# Altium PCB PCB.PcbDoc
Units mm, origin at the board's own origin, x right, y up, seen from the top; angles counter-clockwise.
Board outline 55 x 58 mm, 2 copper layers (Top Layer, Bottom Layer), stack 1.671 mm thick; 38 components, 32 nets, 140 pads, 9 vias.
Unrouted connection lines stored in the file: 2.
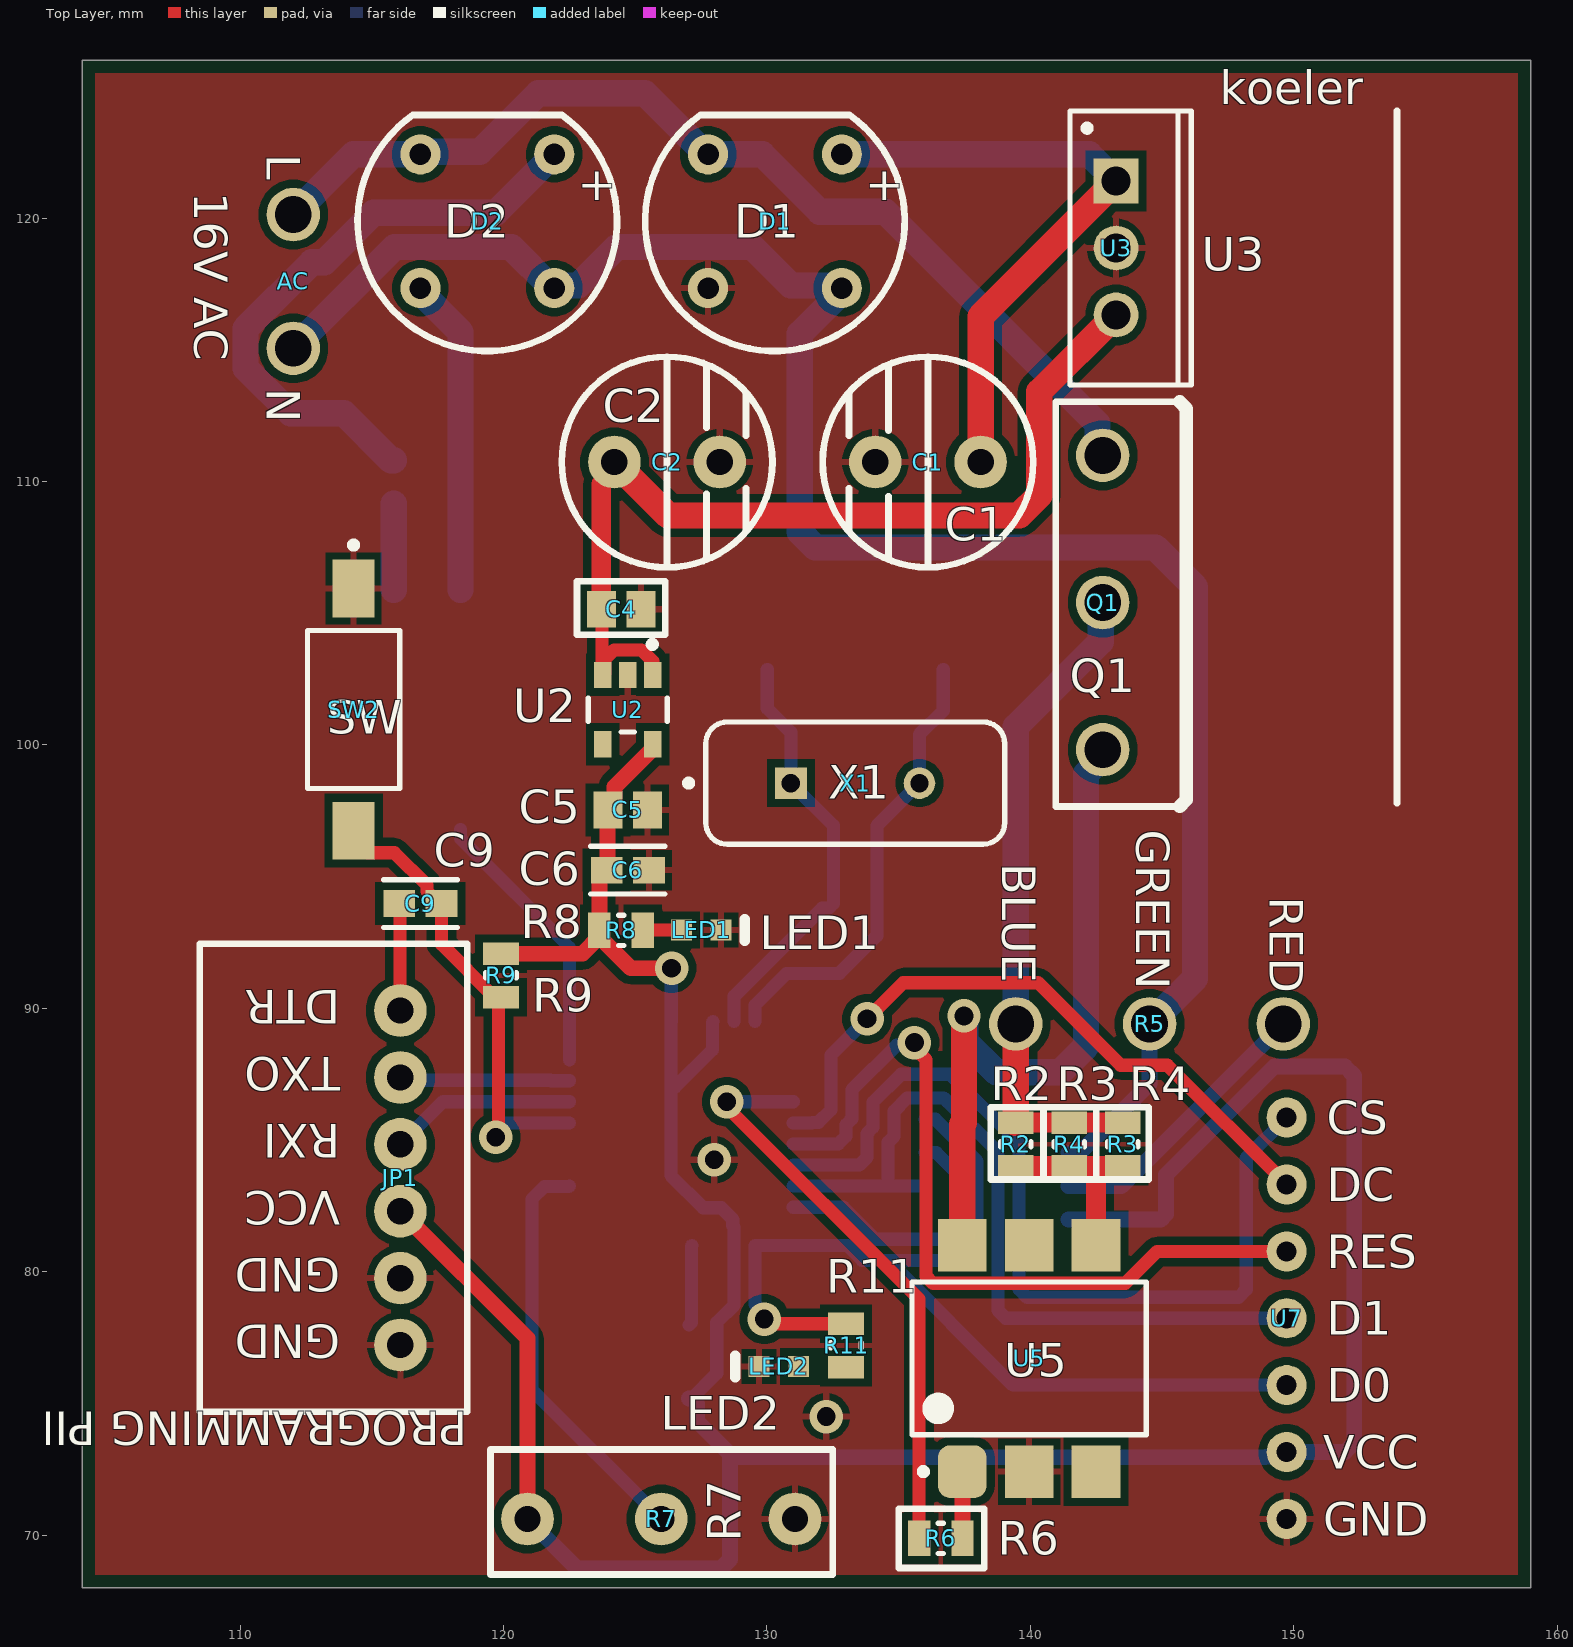
[diagram p0: Top Layer view]
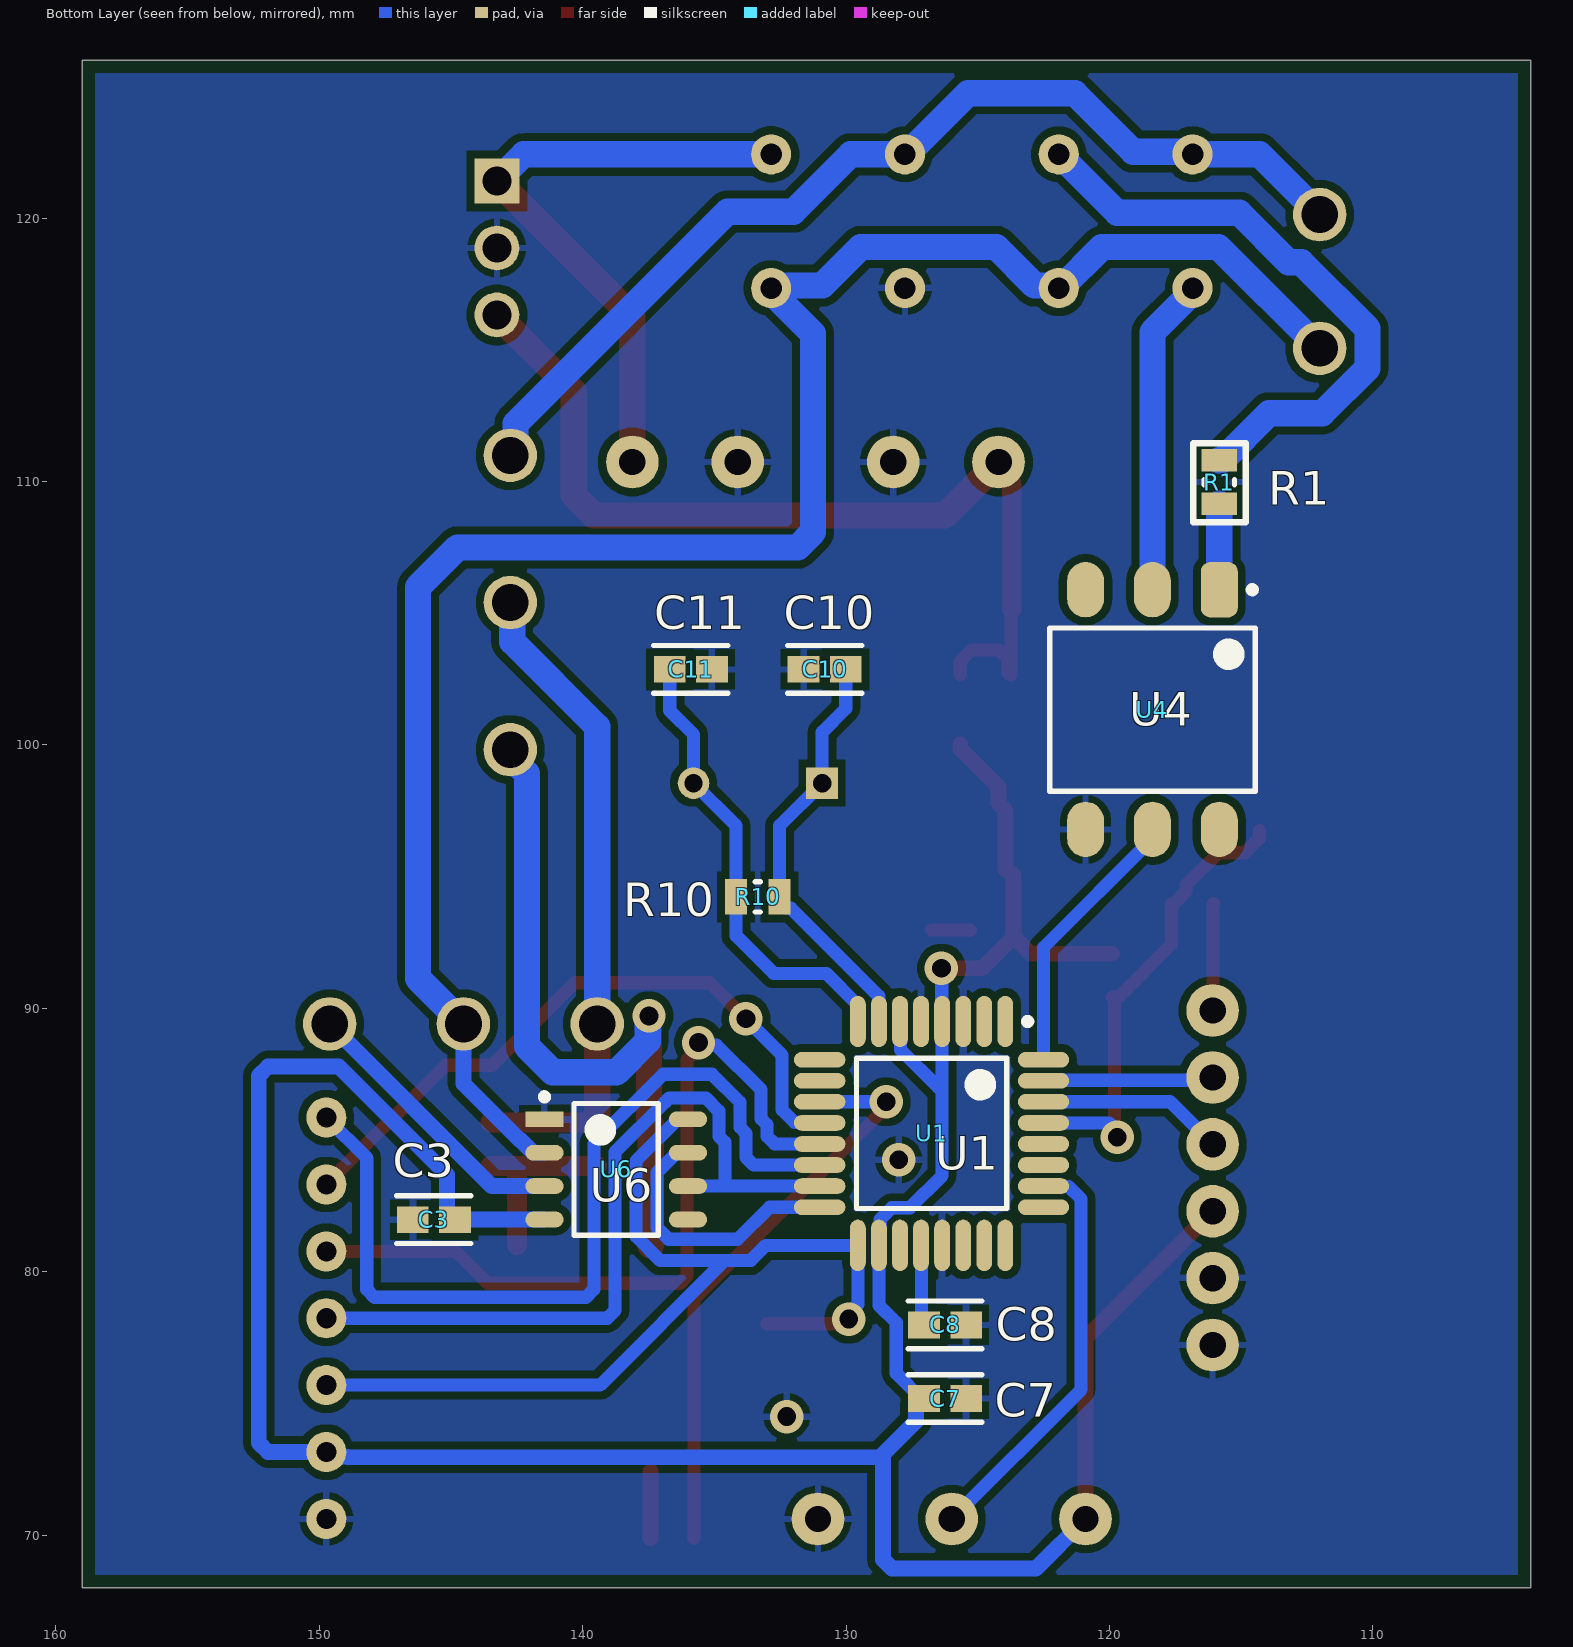
[diagram p1: Bottom Layer view, seen from below]
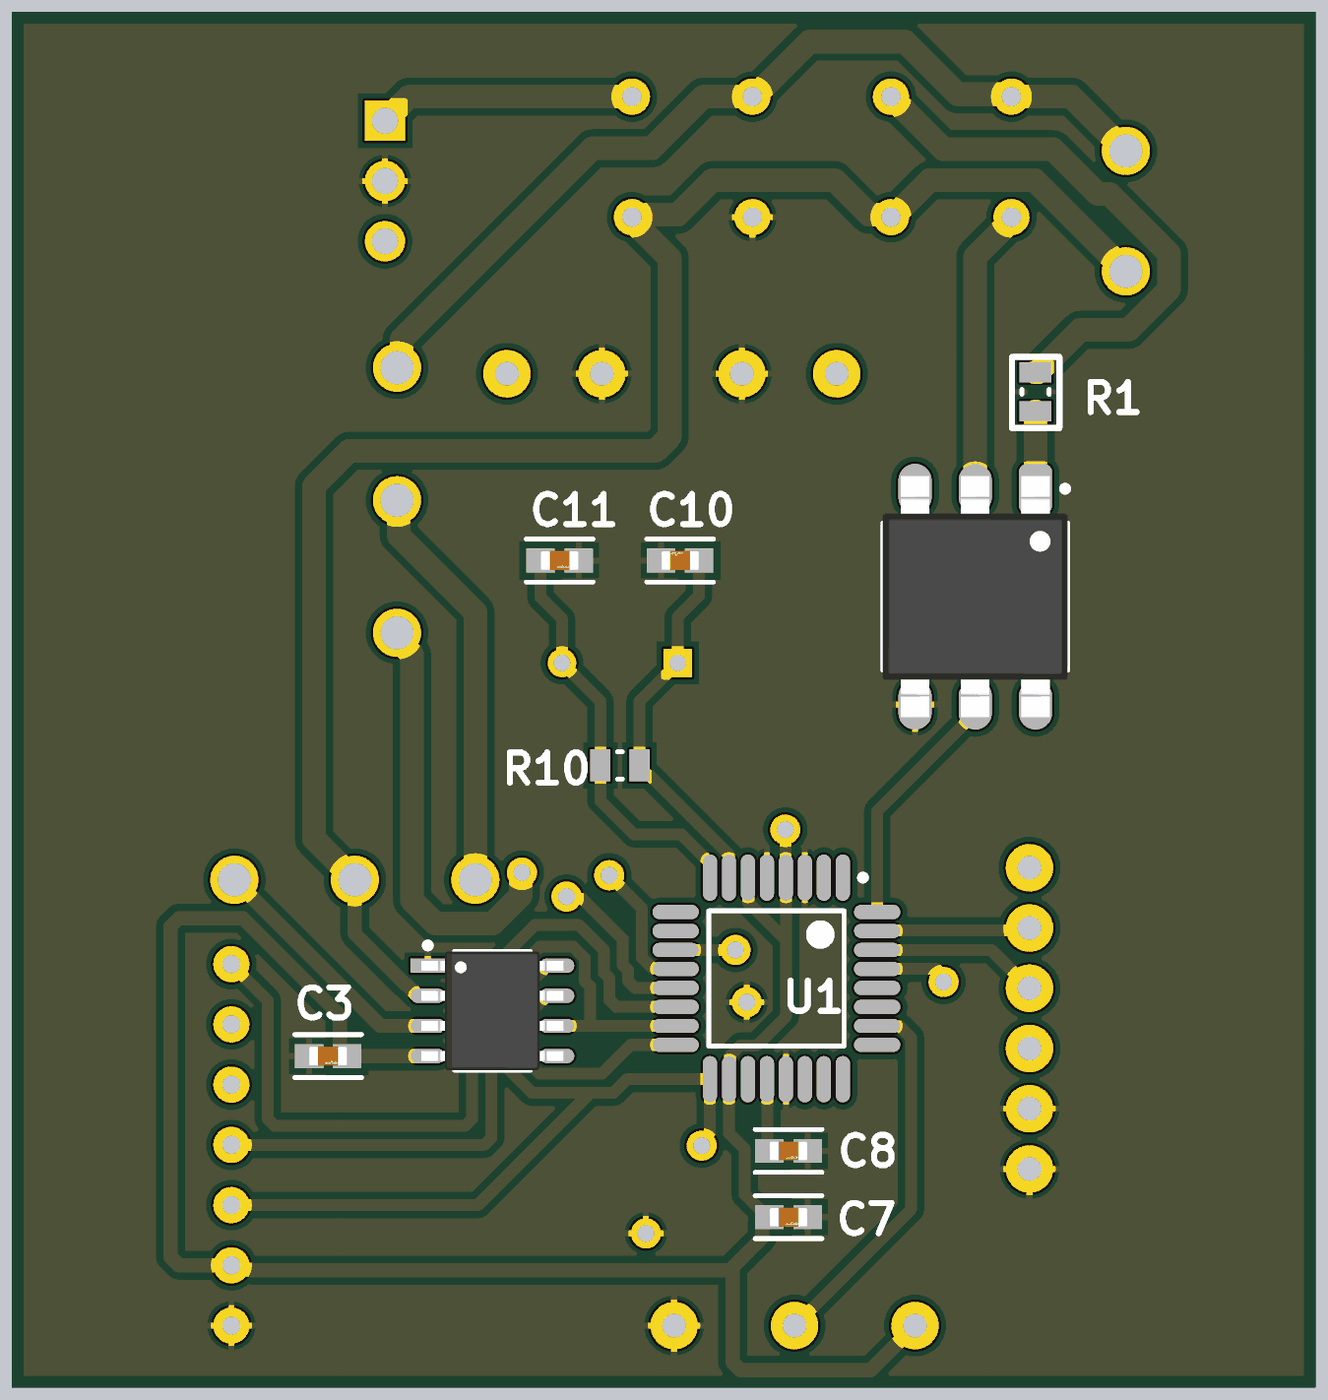
[diagram p2: 3D render of the assembled board from below, using the file's embedded part models]

## Layer stack, top to bottom
Top Solder: solder mask 0.0102, Solder Resist, Dk 3.5
Top Layer: signal copper 0.0356
Dielectric 1: dielectric 1.6, FR-4, Dk 4.8
Bottom Layer: signal copper 0.0356
Bottom Solder: solder mask 0.0102, Solder Resist, Dk 3.5

## Board outline
159,126 104,126 104,68 159,68

## Design rules (kind name [scope] priority, off if disabled: settings)
Clearance [All] p1: gap=0.3 ignorepadtopadclearanceinfootprint=TRUE except(0.2: Arc-SMDPad Track-SMDPad SMDPad-SMDPad)
ComponentClearance [All] p1: gap=0.003 collisioncheckmode=3 verticalgap=0.003 showdistances=FALSE
PolygonConnect [All] p1: connectstyle=Relief reliefconductorwidth=0.254 reliefentries=4 polygonreliefangle="90 Angle" airgapwidth=0.254
RoutingVias [All] p1: holewidth=0.3 width=0.6 viastyle="Through Hole" minholewidth=0.3 minwidth=0.6 maxholewidth=0.3 maxwidth=0.6
SolderMaskExpansion [All] p1: expansion=0.102 istentingtop=FALSE
Width [All] p1: maxlimit=1 minlimit=0.3 preferedwidth=0.5
29 further rules are at their usual default settings.

## Classes and differential pairs
component class Soldeerbord: AC C1 C2 C3 D1 D2 Q1 R1 R2 R3 R4 R5 R6 R7 U3 U4 U5 U6 U7
component class Ardruino_Pro_mini: C4 C5 C6 C7 C8 C9 C10 C11 JP1 LED1 LED2 R8 R9 R10 R11 SW2 U1 U2 X1

## Components (designator, comment, footprint, x,y, rotation, side; value= is the part's Value field where it differs from the comment)
AC "16V" PCB_Voeding_16V_AC 112.014,120.142 r270 top
C1 "1000µF" PCB-Capasitor 138.112,110.744 r180 top
C2 "220µF" PCB-Capasitor 124.206,110.744 r0 top
C3 "0.1uF" FP-GRM188-0_1-e0_2_0_55-IPC_A 145.652,81.975 r180 bottom
C4 "" C0805 124.46,105.156 r0 top value=10uF
C5 "" C0805 124.714,97.536 r0 top value=10uF
C6 "0.1uF" FP-GRM188-0_1-e0_2_0_55-IPC_A 124.714,95.25 r0 top
C7 "0.1uF" FP-GRM188-0_1-e0_2_0_55-IPC_A 126.238,75.184 r180 bottom
C8 "0.1uF" FP-GRM188-0_1-e0_2_0_55-IPC_A 126.238,77.978 r180 bottom
C9 "0.1uF" FP-GRM188-0_1-e0_2_0_55-IPC_A 116.84,93.98 r180 top
C10 "20pF" FP-GRM188-0_1-e0_2_0_55-IPC_A 130.81,102.87 r0 bottom
C11 "20pF" FP-GRM188-0_1-e0_2_0_55-IPC_A 135.89,102.87 r180 bottom
D1 "2W40" PCB_2W40 127.762,117.348 r0 top
D2 "2W40" PCB_2W40 116.84,117.348 r0 top
JP1 "FTDI Basic" PCB_ProgrammingPor 116.078,89.916 r180 top
LED1 "HSMH-C190 RED" AVAG-HSMX-C190_V 127.5,92.975 r0 top
LED2 "HSMG-C190 GREEN" AVAG-HSMX-C190_V 130.45,76.4 r180 top
Q1 "BTB26-600" BTB26-600B 142.748,110.998 r270 top
R1 "2k" RESC2013X50X30LL20T20 115.824,109.982 r270 bottom
R2 "100" RESC2013X50X30LL20T20 139.446,84.836 r270 top
R3 "100" RESC2013X50X30LL20T20 143.51,84.836 r270 top
R4 "100" RESC2013X50X30LL20T20 141.478,84.836 r270 top
R5 "SOLDERING IRON" PCB_Soldering_Iron 139.446,89.408 r0 top
R6 "330" RESC2013X50X30LL20T20 136.6,69.875 r0 top
R7 "WH148_B50K" PCBC_WH148_B50K 120.904,70.612 r0 top
R8 "10k" RESC2013X50X30LL20T20 124.46,92.964 r180 top
R9 "10k" RESC2013X50X30LL20T20 119.9,91.25 r90 top
R10 "1M" RESC2013X50X30LL20T20 133.35,94.234 r180 bottom
R11 "330" RESC2013X50X30LL20T20 133,77.2 r90 top
SW2 "FSMSMTR" TECO-FSMSMTR_V 114.3,101.346 r270 top
U1 "ATmega328P-AU" 32A_M 126.75,85.25 r270 bottom
U2 "MIC5205-3.3YM5-TR" FP-M5-MFG 124.714,101.346 r270 top
U3 "L7809CV" TO220 143.256,118.872 r270 top
U4 "4N25" 4N25-300E 118.364,101.346 r270 bottom
U5 "MOC3020SM" SOP254P920X508-6N 139.954,76.708 r90 top
U6 "MAX6675ISA+" SOP127P600X175-8N 138.725,83.885 r180 bottom
U7 "DISPLAY-OLED-128x64" PCB_SPI_OLED_7pin 149.733,70.612 r90 top
X1 "FOXSLF/160-20" FOX-FOXSLF160-20 133.35,98.552 r0 top

## Footprints (in the part's own frame and the unit in brackets; to place one, negate y for a bottom-side part, rotate by r counter-clockwise, add the part's x,y. Pads: shape width x height; smd on the part's side, far side on the other; paste and mask are expansions set on the pad)
4N25-300E [mm] "SOP, 6-Leads, Body 7,30x6,50mm, Pitch 2,54mm, IPC Medium Density"
  rrect50% 2.1x1.4 smd: 1(-4.55,2.54)
  oval 2.1x1.4 smd: 2(-4.55,0) 3(-4.55,-2.54) 4(4.55,-2.54) 5(4.55,0) 6(4.55,2.54)
  silkscreen extent -4.67,-3.9 3.1,3.91, body extent -5.08,-3.9 5.08,3.9, height 4.6
32A_M [mm] "Thin QFP, 32-Leads, Body 7x7mm, Pitch 0.8mm, IPC Low Density"
  oval 1.95x0.6 smd: 1(-4.25,2.8) 2(-4.25,2) 3(-4.25,1.2) 4(-4.25,0.4) 5(-4.25,-0.4) 6(-4.25,-1.2) 7(-4.25,-2) 8(-4.25,-2.8) 17(4.25,-2.8) 18(4.25,-2) 19(4.25,-1.2) 20(4.25,-0.4) 21(4.25,0.4) 22(4.25,1.2) 23(4.25,2) 24(4.25,2.8)
  oval 0.6x1.95 smd: 9(-2.8,-4.25) 10(-2,-4.25) 11(-1.2,-4.25) 12(-0.4,-4.25) 13(0.4,-4.25) 14(1.2,-4.25) 15(2,-4.25) 16(2.8,-4.25) 25(2.8,4.25) 26(2,4.25) 27(1.2,4.25) 28(0.4,4.25) 29(-0.4,4.25) 30(-1.2,4.25) 31(-2,4.25) 32(-2.8,4.25)
  silkscreen extent -4.37,-2.85 2.85,3.77, body extent -3.5,-3.5 3.5,3.5, height 1.2
AVAG-HSMX-C190_V [mm] "SMD, 2-Leads, Body 1.6x0.8mm, Height 0.9mm"
  rect 0.8x0.8 smd: 1(-0.75,0) 2(0.75,0)
  silkscreen extent 1.65,-0.4 1.65,0.4, body extent -0.8,-0.4 0.8,0.4, height 0.9
BTB26-600B [mil]
  round 80 hole 55: 1(0,0) 2(220,0) 3(440,0)
  silkscreen extent -80,-70 525,125, body extent -80,-55 525,125, height 820
C0805 [mm] "Chip Capacitor, Body 2.0x1.3mm, IPC High Density"
  rect 1.1x1.4 smd: 1(-0.75,0) 2(0.75,0)
  body extent -1.1,-0.72 1.1,0.72, height 1.4
FOX-FOXSLF160-20 [mm] "THD, 2-Leads, Body 11.35x4.65mm"
  rect 1.2x1.2 hole 0.7: 1(-2.44,0)
  round 1.2 hole 0.7: 2(2.44,0)
  silkscreen extent -6.45,-2.32 5.68,2.32, body extent -5.67,-2.32 5.68,2.33, height 3.6
FP-GRM188-0_1-e0_2_0_55-IPC_A [mm]
  rect 1.208x1.012 smd paste+0 mask+0: 1(-0.802,0) 2(0.802,0)
  silkscreen extent -1.41,-0.91 1.41,0.91, body extent -0.8,-0.4 0.8,0.4, height 0.9
FP-M5-MFG [mm]
  rect 1x0.66 smd paste+0 mask+0: 1(-1.315,0.95) 2(-1.315,0) 3(-1.315,-0.95) 4(1.315,-0.95) 5(1.315,0.95)
  silkscreen extent -2.6,-1.5 0.85,1.5, body extent -1.4,-1.46 1.4,1.46, height 1.3
PCB-Capasitor [mm]
  round 2 hole 1: 1(0,0) 2(4,0)
  silkscreen extent -2,-4 6,4, body extent -2,-4 6,4, height 16
PCB_2W40 [mil]
  round 60 hole 32: 1(0,200) 2(0,0) 3(200,200) 4(200,0)
  silkscreen extent -94,-94 294,259, body extent -95,-95 295,260, height 180
PCB_ProgrammingPor [mm]
  round 2 hole 1: DTR(0,0) GND(0,12.7) GND(0,10.16) RXI(0,5.08) TXO(0,2.54) VCC(0,7.62)
  silkscreen extent -2.54,-2.54 7.62,15.24, body extent -1.27,-1.27 1.27,13.97, height 20
PCB_Soldering_Iron [mil]
  round 80 hole 55: B(0,0) G(200,0) R(400,0)
  body extent -30,-30 430,30, height 300
PCB_SPI_OLED_7pin [mil]
  round 60 hole 30: 1(0,0) 2(100,0) 3(200,0) 4(300,0) 5(400,0) 6(500,0) 7(600,0)
  body extent -25,-25 625,25, height 300
PCB_Voeding_16V_AC [mil]
  round 80 hole 55: L(0,0) N(200,0)
  body extent -30,-30 230,30, height 300
PCBC_WH148_B50K [mm]
  round 2 hole 1: 1(0,0) 2(5.08,0) 3(10.16,0)
  body extent -1.25,-2 11.5,3.75, height 20
RESC2013X50X30LL20T20 [mm] "Chip Resistor, 2-Leads, Body 2.00x1.25mm, IPC High Density"
  rect 0.85x1.35 smd: 1(-0.825,0) 2(0.825,0)
  silkscreen extent -0.1,-0.58 0.1,0.58, body extent -1.1,-0.72 1.1,0.72, height 0.5
SOP127P600X175-8N [mm] "SOP, 8-Leads, Body 4,90x3,90mm, Pitch 1,27mm, IPC Medium Density"
  rect 1.45x0.6 smd: 1(-2.725,1.905)
  oval 1.45x0.6 smd: 2(-2.725,0.635) 3(-2.725,-0.635) 4(-2.725,-1.905) 5(2.725,-1.905) 6(2.725,-0.635) 7(2.725,0.635) 8(2.725,1.905)
  silkscreen extent -2.85,-2.5 1.6,2.88, body extent -3,-2.5 3,2.5, height 1.75
SOP254P920X508-6N [mm] "SOP, 6-Leads, Body 8,51x6,35mm, Pitch 2,54mm, IPC Medium Density"
  rrect50% 2x1.85 smd: 1(-4.3,2.54)
  rect 2x1.85 smd: 2(-4.3,0) 3(-4.3,-2.54) 4(4.3,-2.54) 5(4.3,0) 6(4.3,2.54)
  silkscreen extent -4.42,-4.45 2.9,4.45, body extent -4.58,-4.45 4.58,4.45, height 5.08
TECO-FSMSMTR_V [mm] "SMD, 2-Leads, Body 6x3.5mm, Pitch 9.19mm"
  rect 2.2x1.6 smd: 1(-4.595,0)
  rect 2.18x1.6 smd: 2(4.595,0)
  silkscreen extent -6.37,-1.75 3,1.75, body extent -4.98,-1.75 4.98,1.75, height 4.4
TO220 [mm] "TO, Thru-Hole, Vertical, Heatsink Mounted; 3 In-Line Leads; Pitch 2.54 mm"
  rect 1.7x1.7 hole 1.1: 1(-2.54,0)
  round 1.7 hole 1.1: 2(0,0) 3(2.54,0)
  silkscreen extent -5.2,-1.75 5.2,2.85, body extent -5.25,-1.8 5.25,2.9, height 19.7

## Part data
AC: library part Voeding_16V_AC
C1 C2: library part Capasitor
C3 C7 C8 C9 C10 C11: library part CMP-2006-02792-2, "Chip Multilayer Ceramic Capacitors for General Purpose, 0603, 10uF, X5R, 15%, 20%, 6.3V", Capacitance=10uF, Case Code (Imperial)=0603, Case Code (Metric)=1608, Dielectric=X5R, Max Operating Temperature=85°C, Min Operating Temperature=-55°C, Package Quantity=4000, Tolerance=20%, Voltage=6.3V, Case/Package=0603, Depth=0.8mm, Height=0.8mm, Lead Free="Lead Free", Length=1.6mm, Material=Ceramic, Mount="Surface Mount", Packaging="Tape and Reel", Radiation Hardening=No, REACH SVHC="No SVHC", Termination=SMD/SMT, Thickness=0.035inch, Voltage Rating=6.3V, Voltage Rating (DC)=6.3V, Width=0.031inch
C4 C5: library part "Cap Pol3", "Polarized Capacitor (Surface Mount)", LatestRevisionDate=29-May-2009, LatestRevisionNote="IPC-7351 Footprint Added.", PackageDescription="Chip Capacitor", PackageReference=C0805, Published=8-Jun-2000, Publisher="Altium Limited"
C6: library part CMP-2006-02792-2, "Chip Multilayer Ceramic Capacitors for General Purpose, 0603, 10uF, X5R, 15%, 20%, 6.3V", Case Code (Imperial)=0603, Case Code (Metric)=1608, Dielectric=X5R, Max Operating Temperature=85°C, Min Operating Temperature=-55°C, Package Quantity=4000, Tolerance=20%, Voltage=6.3V, Capacitance=0.1uF, Case/Package=0603, Depth=0.8mm, Height=0.8mm, Lead Free="Lead Free", Length=1.6mm, Material=Ceramic, Mount="Surface Mount", Packaging="Tape and Reel", Radiation Hardening=No, REACH SVHC="No SVHC", Termination=SMD/SMT, Thickness=0.035inch, Voltage Rating=6.3V, Voltage Rating (DC)=6.3V, Width=0.031inch
JP1: library part ProgrammingPort
LED1: library part CMP-1744-00004-1, "LED Uni-Color Red, 65 mW, 20 mA, -40 to 85 degC, 2-Pin SMD, RoHS, Tape and Reel", Current Rating="1 A", Max Operating Temperature="85 degC", Min Operating Temperature="-30 degC", Package Quantity=2000, ComponentLink1Description="Manufacturer URL", ComponentLink1URL=http://www.avagotech.com/, ComponentLink2Description=Datasheet, ComponentLink2URL=http://docs.avagotech.com/docs/AV02-0551EN, ComponentLink3Description="Package Specification", ComponentLink3URL=http://www.fairchildsemi.com/dwg/MA/MA03D.pdf, Connector Type=USB, Contact Material=Copper, Contact Plating=Gold, DatasheetVersion=Mar-12, Gender=Male, Height="2.8 mm", Lead Pitch="0.65 mm", Length="7.5 mm", Mount="Surface Mount", PackageDescription="2-Pin Surface Mount Device, Body 1.6 x 0.8 mm, Height 0.9 mm", PackageReference=HSMX-C190, Packaging="Tape and Reel", Pins=5, REACH SVHC="No SVHC", RoHSCompliant=true, Width="5.6 mm"
LED2: library part CMP-1744-00002-1, "Chip LED, Green, 2.2 V, -40 to 85 degC, 2-Pin SMD, RoHS, Tape and Reel", Case\Package=SOIC, Clock Frequency="100 KHz", Frequency="400 KHz", Max Operating Temperature="85 degC", Max Supply Voltage="5.5 V", Min Operating Temperature="-40 degC", Min Supply Voltage="1.7 V", Nominal Supply Current="2 mA", Package Quantity=3000, Access Time="3500 ns", ComponentLink1Description="Manufacturer URL", ComponentLink1URL=http://www.avagotech.com/, ComponentLink2Description=Datasheet, ComponentLink2URL=http://docs.avagotech.com/docs/AV02-0551EN, ComponentLink3Description="Package Specification", ComponentLink3URL=http://www.fairchildsemi.com/dwg/MA/MA03D.pdf, DatasheetVersion=Mar-12, Density="32 kb", Height="1.5 mm", Interface=Serial, Length="5 mm", Max Clock Frequency="100 KHz", Mount="Surface Mount", PackageDescription="2-Pin Surface Mount Device, Body 1.6 x 0.8 mm, Height 0.9 mm", PackageReference=HSMX-C190, Packaging="Tape and Reel", Pins=8, Radiation Hardening=No, REACH SVHC="No SVHC", RoHSCompliant=true, Width="4 mm"
Q1: library part BTB26-600B
R1 R2 R3 R4 R6 R8 R9 R10 R11: library part CMP-2001-04896-1, Manufacturer="Vishay Dale", Part Number=CRCW08050000Z0EA
R5: library part Soldering_Iron
SW2: library part CMP-2000-07501-1, "FSMSM Push Button Switch, 50 mA, -35 to 85 degC, 2-Pin SMD, RoHS, Tape and Reel", Case\/Package=SMD/SMT, Contact Current Rating=50mA, Contact Resistance=100mOhm, Manufacturer="TE Connectivity", Max Operating Temperature=85degC, Max Voltage Rating (DC)=12V, Min Operating Temperature=-35degC, Operating Force=180gf, Package Description="2-Pin Surface Mount Device, Body 6 x 3.5 mm, Pitch 9.19 mm", Package Quantity=1800, Voltage Rating (DC)=24V, Actuator Length=1.07mm, Actuator Material=Polyamide, Contact Material=Brass, Contact Plating=Silver, Current Rating=50mA, Datasheet URL=http://www.te.com/commerce/DocumentDelivery/DDEController?Action=showdoc&DocId=Customer+Drawing%7F1437566-3%7FC2%7Fpdf%7FEnglish%7FENG_CD_1437566-3_C2_1437566_3_1_c.dwg.pdf%7F1437566-4, Datasheet Version="Rev. C2, 08/2014", Electrical Life=20000Cycles, ELV=Compliant, Illumination Type=Illuminated, Lead Free=LeadFree, Manufacturer URL=http://www.te.com/, Mechanical Life=20000Cycles, Mount=SurfaceMount, Mounting Technology=SurfaceMount, Orientation=Straight, Package Reference=FSMSMTR, Packaging=TapeandReel, REACH SVHC=Unknown, RoHSCompliant=true, Switch Travel=0.25mm, Termination=GullWing, Throw Configuration=SPST
U1: library part CMP-0095-00269-2, "8-bit AVR Microcontroller, 32KB Flash, 1KB EEPROM, 2KB SRAM, 32-pin TQFP, Industrial Grade (-40°C to 85°C)", Code_JEDEC=MS-026-ABA, ComponentLink1Description="Manufacturer URL", ComponentLink1URL=http://www.atmel.com/, ComponentLink2Description="ATmega48A/48PA/88A/88PA/168A/168PA/328/328P Datasheet", ComponentLink2URL=http://www.atmel.com/dyn/resources/prod_documents/doc8271.pdf, ComponentLink3Description="ATmega48A/48PA/88A/88PA/168A/168PA/328/328P Summary", ComponentLink3URL=http://www.atmel.com/dyn/resources/prod_documents/8271S.pdf, DatasheetVersion="revD, May-2011", PackageDescription="32-Lead, 7x7x1.0 mm Body, 0.8mm Lead Pitch, Thin Profile Plastic Quad Flat Package (TQFP)", PackageReference=32A, PackageVersion="revC, Oct-2010", RevisionNote="DatasheetVersion & PackageVersion updated. URLs added."
U2: library part CMP-06324-000014-1, "IC REG LINEAR 3.3V 150MA SOT23-5", Dropout Voltage=165mV, Manufacturer=Microchip, Max Junction Temp=+125°C, Max Supply Voltage=16V, Min Supply Voltage=2.5V, Output Current=150mA, Package=M5, Temperature="-40°C to +125°C", Temperature Range Low=-40°C, Accuracy Percentage=2%, Automotive=No, ComponentLink2Description=Datasheet, ComponentLink2URL=http://ww1.microchip.com/downloads/en/DeviceDoc/20005785A.pdf, Device Class L1="Integrated Circuits (ICs)", Device Class L2="Power Management ICs", Device Class L3="Voltage Regulators - Linear", Digikey Description="IC REG LINEAR 3.3V 150MA SOT23-5", Height=1.45mm, Ipc Land Pattern Name=SOT95P280X118-5, Lead Free=Yes, Manufacturer Part Number=MIC5205-3.3YM5-TR, Mouser Description="LDO Voltage Regulators", Number Of Outputs=1, Octopart=https://octopart.com/mic5205-3.3ym5-tr-microchip-66802130, Output Type=Fixed, RoHS=TRUE, Standoff Height=0mm, Temperature Range High=+125°C
U3: library part CMP-0244-00424-1, "Positive Voltage Regulator, 24V, 3-Pin TO-220", ComponentLink1Description="Manufacturer URL", ComponentLink1URL=http://www.st.com, ComponentLink2Description=Datasheet, ComponentLink2URL=http://www.st.com/internet/com/TECHNICAL_RESOURCES/TECHNICAL_LITERATURE/DATASHEET/CD00000444.pdf, ComponentLink3Description="Package Specification", ComponentLink3URL=http://www.st.com/internet/com/TECHNICAL_RESOURCES/TECHNICAL_LITERATURE/PACKAGE_INFORMATION/CD00004649.pdf, DatasheetVersion=16/11/2011, PackageDescription="TO, Thru-Hole, Vertical, Heatsink Mounted; 3 In-Line Leads; Pitch 2.54 mm", PackageReference=TO220, PackageVersion=ver3.0
U4: library part 4N25-300E
U7: library part SPI_OLED_7Pin
X1: library part CMP-1749-00003-1, "Resistance Weld Thru-Hole Crystal, 16 MHz, -20 to 70 degC, 2-Pin THD, RoHS, Bulk", Case\Package=Axial, Max Operating Temperature="155 degC", Min Operating Temperature="-55 degC", Package Quantity=200, Power Rating="250 mW", Resistance="221 kohm", Tolerance=1%, Voltage Rating="250 V", ComponentLink1Description="Manufacturer URL", ComponentLink1URL=http://www.foxonline.com/, ComponentLink2Description=Datasheet, ComponentLink2URL=http://www.foxonline.com/pdfs/hc49slf.pdf, DatasheetVersion=Mar-15, Length="0.248 inch", Mount="Through Hole", PackageDescription="2-Pin Through Hole Device, Body 11.35 x 4.65 mm", PackageReference=FOXSLF160-20, Packaging=Bulk, RoHSCompliant=true

## Via types
v1: diameter 1.27, hole 0.711, Top Layer to Bottom Layer, 9 vias

## Nets (pads, with @x,y where several pads share a name; then routed paths per layer and width w, separated by ;. In a path a pad name is that pad's centre, name@x,y a point inside that pad or via, vN(x,y) a via of type N, cw(c..) or ccw(c..) an arc to the next point about the centre after c; other vN are vias at no path point)
9V_DC: C2.1 C4.1 U2.1 U2.3 U3.3 | length 37
  Top Layer w0.5: C4.1 123.737,105.129 123.737,102.688 U2.3 123.844,102.741 123.844,103.257 124.198,103.611 125.23,103.611 125.664,103.177 U2.1
  Top Layer w0.75: C4.1 123.71,109.91 124.206,110.406 C2.1
  Top Layer w1: C2.1 126.238,108.712 139.573,108.712 140.335,109.474 140.335,113.411 U3.3
16V_AC_L: AC.L D1.1 D2.1 Q1.1 | length 38.9
  Bottom Layer w1: AC.L 114.3,122.428 D2.1 116.94,122.528 119.094,122.528 121.315,124.75 125.365,124.75 127.687,122.428 129.822,122.428 132,120.25 134.5,120.25 142.551,112.199 142.551,111.195 Q1.1
16V_AC_N: AC.N D1.4 D2.4 R5.G U6.2 | length 73.7
  Bottom Layer w0.6: U6.2 141.875,84.52 142.345,84.99 142.382,84.99 144.526,87.134 R5.G
  Bottom Layer w1: AC.N 115.862,118.91 120.283,118.91 121.845,117.348 121.945,117.448 122.837,117.448 124.299,118.91 129.442,118.91 130.903,117.448 D1.4@132.742,117.448 ; D1.4 132.842,117.206 131.25,115.614 131.25,108.086 131.836,107.5 144.75,107.5 146.25,106 146.25,91.132 R5.G
GND: C1.2 C2.2 C3.1 C4.2 C5.2 C6.2 C7.2 C8.2 C10.2 C11.2 D1.2 JP1.GND LED1.2 LED2.2 R7.3 SW2.1 U1.3 U1.5 U1.21 U2.2 U3.2 U4.4 U5.2 U6.1 U7.1
  other v1: 132.25,74.5 128,84.25
NetC1_1: C1.1 D1.3 U3.1 | length 23.6
  Top Layer w1: C1.1 138.112,116.268 U3.1
  Bottom Layer w1: D1.3 142.24,122.428 U3.1
NetC8_1: C8.1 U1.20 | length 3.1
  Bottom Layer w0.5: C8.1 127.131,78.069 127.131,80.981 U1.20
NetC9_1: C9.1 R9.1 SW2.2 U1.29 | length 17.8
  Top Layer w0.5: SW2.2 114.3,96.461 114.85,95.911 115.854,95.911 117.092,94.672 117.092,94.431 117.544,93.98 C9.1 117.642,92.433 119.65,90.425 R9.1 119.8,90.325 119.8,85.2 v1(119.7,85.1)
  Bottom Layer w0.5: v1@119.7,85.325 120.025,85.65 U1.29
NetC9_2: C9.2 JP1.DTR | length 4.1
  Top Layer w0.5: C9.2 116.058,93.96 116.058,89.936 JP1.DTR
NetC10_1: C10.1 R10.2 U1.7 X1.1 | length 16.1
  Bottom Layer w0.5: U1.7 128.75,90.459 132.1,93.809 132.35,93.809 132.525,93.984 R10.2 132.525,96.937 X1.1 130.91,100.484 130.008,101.386 C10.1
NetC11_1: C11.1 R10.1 U1.8 X1.2 | length 17.5
  Bottom Layer w0.5: U1.8 129.55,90.128 130.747,91.325 132.75,91.325 134.175,92.75 R10.1 134.175,96.937 X1.2 135.79,100.404 136.692,101.306 C11.1
NetD2_2: D2.2 U4.2 | length 12.1
  Bottom Layer w1: D2.2 116.84,117.206 118.364,115.682 U4.2
NetD2_3: D2.3 R1.1 | length 23
  Bottom Layer w1: R1.1 115.724,110.807 113.935,112.596 111.912,112.596 110.198,114.31 110.198,115.814 112.71,118.326 113.188,118.326 115.072,120.21 119.702,120.21 D2.3
NetJP1_RXI: JP1.RXI U1.30 | length 7.1
  Bottom Layer w0.5: JP1.RXI 117.692,86.45 U1.30
NetJP1_TXO: JP1.TXO U1.31 | length 6.5
  Bottom Layer w0.5: JP1.TXO 116.185,87.269 121.779,87.269 121.798,87.25 U1.31
NetLED1_1: LED1.1 R8.1 | length 1.5
  Top Layer w0.5: R8.1 125.291,92.97 126.745,92.97 LED1.1
NetLED2_1: LED2.1 R11.1
NetQ1_2: Q1.2 R2.1 R3.1 R4.1 R5.B | length 25.2
  Top Layer w0.75: R2.1 R4.1 R3.1
  Top Layer w1: R2.1 R5.B
  Bottom Layer w1: R5.B 139.446,100.696 142.675,103.925 142.675,105.337 Q1.2
NetQ1_3: Q1.3 U5.6 | length 26.7
  Top Layer w1: U5.6 137.414,85.592 137.481,85.659 v1(137.481,89.712)
  Bottom Layer w1: v1(137.481,89.712) 137.532,89.66 137.532,88.753 138.718,87.568 141.13,87.568 142.113,88.551 142.113,98.908 142.748,99.543 Q1.3
NetR1_2: R1.2 U4.1 | length 3.3
  Bottom Layer w1: U4.1 R1.2
NetR2_2: R2.2 R3.2 R4.2 U5.4 | length 7.1
  Top Layer w0.75: R2.2 R4.2 142.494,84.011 ; U5.4 142.494,84.011 ; R3.2 142.494,84.011
NetR5_R: R5.R U6.3 | length 10.7
  Bottom Layer w0.6: U6.3 143.448,83.25 R5.R
NetR6_2: R6.2 U5.1 | length 2.5
  Top Layer w0.6: U5.1 137.419,72.403 137.419,69.881 R6.2
NetU1_16: U1.16 U6.7 | length 10.4
  Bottom Layer w0.5: U1.16 132.9,82.45 134.12,81.23 136.736,81.23 137.175,81.669 137.175,83.77 136.425,84.52 U6.7
"Pin 2": U1.32 U4.5 | length 10.5
  Bottom Layer w0.5: U4.5 118.364,96.446 122.5,92.31 U1.32
"Pin 7": R6.1 U1.11 | length 22.2
  Top Layer w0.5: v1(128.475,86.45) 128.475,86.254 135.775,78.954 R6.1
  Bottom Layer w0.5: v1@128.45,86.475 v1(128.475,86.45) U1.11
"Pin 8": U1.12 U7.6 | length 25.1
  Top Layer w0.5: v1(133.8,89.6) 135.174,90.974 140.296,90.974 143.428,87.842 145.203,87.842 U7.6
  Bottom Layer w0.5: U1.12 131.702,85.65 131.721,85.669 131.955,85.669 132.425,86.139 132.425,88.225 v1@133.6,89.4
"Pin 9": U1.13 U7.5 | length 30.1
  Top Layer w0.5: v1(135.6,88.7) 135.6,88.492 136.039,88.053 136.039,79.822 136.303,79.558 143.605,79.558 144.819,80.772 U7.5
  Bottom Layer w0.5: U1.13 132.707,84.85 133,85.143 133,85.583 133.225,85.808 133.225,86.906 134.919,88.6 v1@135.3,88.6
"Pin 10": U1.14 U7.7 | length 33.8
  Bottom Layer w0.5: U1.14 133.507,84.05 133.8,84.343 133.8,85.252 134.025,85.477 134.025,86.432 135.093,87.5 136.945,87.5 139.575,84.87 139.575,79.325 139.868,79.032 147.907,79.032 148.2,79.325 148.2,84.319 U7.7
"Pin 11": U1.15 U6.6 U7.4 | length 30
  Bottom Layer w0.5: U1.15 134.6,83.25 ; U6.6 134.6,83.25 ; 136.891,86.422 136.723,86.59 135.314,86.59 134.825,86.101 134.825,85.145 134.6,84.92 134.6,83.25 ; 136.892,86.422 138.775,84.539 138.775,78.525 139.068,78.232 U7.4
"Pin 13": R11.2 U1.17 U6.8 U7.3 | length 37.4
  Top Layer w0.5: v1@130.175,78.025 R11.2
  Bottom Layer w0.5: v1(129.9,78.2) 129.9,78.408 129.55,78.758 U1.17 133.047,81 133.617,80.43 134.6,80.43 ; U6.8 136.393,85.79 137.975,84.208 137.975,81.338 137.067,80.43 134.6,80.43 ; U7.3 139.338,75.692 134.6,80.43
"Pin A3": R7.2 U1.26 | length 15.8
  Bottom Layer w0.5: U1.26 122.481,83.231 121.545,83.231 121.075,82.761 121.075,75.521 R7.2
VCC: C3.2 C5.1 C6.1 C7.1 JP1.VCC R7.1 R8.2 R9.2 U1.4 U1.6 U1.18 U2.5 U6.4 U7.2 | length 118.3
  Top Layer w0.6: JP1.VCC 120.904,77.47 R7.1 ; R9.2 122.996,92.075 R8.2@123.635,92.714 ; U2.5 125.664,99.861 124.214,98.411 124.214,97.786 C5.1 123.938,97.51 123.938,95.276 C6.1 123.841,95.25 123.635,95.044 R8.2 R8.2@123.635,92.714 ; v1(126.375,91.525) 124.824,91.525 R8.2@123.635,92.714
  Bottom Layer w0.5: v1(126.375,91.525) 126.363,91.513 126.363,89.513 U1.4 126.35,87 126.35,83.65 127.575,82.425 128.261,82.425 128.7,81.986 128.7,81.752 128.75,81.702 128.75,78.726 128.094,78.07 128.094,76.14 C7.1@127.138,75.184 ; 126.5,87 127.931,88.431 127.931,89.481 U1.6
  Bottom Layer w0.6: R7.1 122.791,68.725 128.249,68.725 128.6,69.076 128.6,73.062 ; C7.1 127.138,75.184 127.344,74.978 127.344,74.318 128.71,72.952 148.92,72.952 148.943,72.975 149.556,72.975 U7.2 151.949,73.152 152.3,73.503 152.3,87.441 151.949,87.792 149.263,87.792 145.154,83.683 145.154,82.181 144.948,81.975 C3.2 144.845,81.98 U6.4
pads on no net: U1.1 U1.2 U1.9 U1.10 U1.19 U1.22 U1.23 U1.24 U1.25 U1.27 U1.28 U2.4 U4.3 U4.6 U5.3 U5.5 U6.5

## Polygon pours and split planes (outlines as drawn)
GND on Bottom Layer "GND_L02_P001" (solid, remove dead copper, pour order 1): 104.5,125.5 104.5,68.5 158.5,68.5 158.5,125.5
GND on Top Layer "GND_L01_P000" (solid, remove dead copper, pour order 0): 104.5,125.5 104.5,68.5 158.5,68.5 158.5,125.5

## Silkscreen, mask and mechanical layers (free items; w line width, h text height)
Top Overlay:
  lines w0.254: 153.924,97.79 153.924,124.079 ; 140.5,83.5 142.5,83.5 ; 140.5,83.5 140.5,86.25 ; 140.5,83.5 138.5,83.5 138.5,86.25 140.5,86.25 ; 140.5,83.5 140.5,86.25 ; 140.5,86.25 142.5,86.25 ; 142.5,83.5 144.5,83.5 144.5,86.25 142.5,86.25 ; 142.5,83.5 142.5,86.25 ; 142.5,83.5 142.5,86.25 ; 119.5,68.5 132.5,68.5 132.5,73.25 119.5,73.25 119.5,68.5 ; 122.784,104.191 126.136,104.191 126.136,106.223 122.784,106.223 122.784,104.191 ; 135,68.75 138.25,68.75 138.25,71 135,71 135,68.75
  text "koeler" at 147.193,124.333 h1.27
  text "D2" at 117.754,119.254 h1.27
  text "D1" at 128.754,119.254 h1.27
  text "U3" at 146.504,118.004 h1.27
  text "C2" at 123.754,112.254 h1.27
  text "C1" at 136.754,107.754 h1.27
  text "Q1" at 141.504,102.004 h1.27
  text "U2" at 120.371,100.863 h1.27
  text "SW" at 113.309,100.432 h1.27
  text "X1" at 132.334,97.968 h1.27
  text "C5" at 120.574,97.028 h1.27
  text "C9" at 117.348,95.377 h1.27
  text "C6" at 120.574,94.666 h1.27
  text "R8" at 120.65,92.659 h1.27
  text "LED1" at 129.718,92.253 h1.27
  text "R9" at 121.082,89.865 h1.27
  text "R2" at 138.504,86.504 h1.27
  text "R3" at 141.004,86.504 h1.27
  text "R4" at 143.754,86.504 h1.27
  text "R11" at 132.258,79.197 h1.27
  text "U5" at 139.004,76.004 h1.27
  text "LED2" at 125.959,73.99 h1.27
  text "R7" at 128.996,69.754 h1.27 r90
  text "R6" at 138.754,69.254 h1.27
Bottom Overlay:
  lines w0.254: 114.815,108.455 116.815,108.455 116.815,111.455 114.815,111.455 114.815,108.455
  text "R1" at 113.97,109.118 h1.27
  text "C10" at 132.359,104.394 h1.27
  text "C11" at 137.287,104.394 h1.27
  text "U4" at 119.253,100.736 h1.27
  text "R10" at 138.455,93.497 h1.27
  text "U1" at 126.619,83.871 h1.27
  text "C3" at 147.218,83.591 h1.27
  text "U6" at 139.725,82.652 h1.27
  text "C8" at 124.308,77.368 h1.27
  text "C7" at 124.358,74.498 h1.27
Board Outline:
  lines w0.254: 104.013,68.021 158.953,68.021 158.953,125.933 104.013,125.933 104.013,68.021

## Text inside footprints (layer, text, board x,y; h text height)
AC: Top Overlay "16V AC" at 108.254,120.996 h1.27 r270; Top Overlay "N" at 110.998,113.538 h1.27 r270; Top Overlay "L" at 110.998,122.428 h1.27 r270
D1: Top Overlay "+" at 133.731,120.692 h1.27
D2: Top Overlay "+" at 122.809,120.692 h1.27
JP1: Top Overlay "PROGRAMMING PINS TO FTDI BASIC" at 118.618,74.676 h1.27 r180; Top Overlay "RXI" at 113.792,85.598 h1.27 r180; Top Overlay "DTR" at 113.792,90.678 h1.27 r180; Top Overlay "TXO" at 113.792,88.138 h1.27 r180; Top Overlay "VCC" at 113.792,83.058 h1.27 r180; Top Overlay "GND" at 113.792,80.518 h1.27 r180; Top Overlay "GND" at 113.792,77.978 h1.27 r180
R5: Top Overlay "RED" at 149.098,94.234 h1.27 r270; Top Overlay "GREEN" at 144.018,96.774 h1.27 r270; Top Overlay "BLUE" at 138.938,95.504 h1.27 r270
U7: Top Overlay "RES" at 151.257,80.137 h1.27; Top Overlay "CS" at 151.257,85.217 h1.27; Top Overlay "DC" at 151.257,82.677 h1.27; Top Overlay "D1" at 151.257,77.597 h1.27; Top Overlay "D0" at 151.257,75.057 h1.27; Top Overlay "VCC" at 151.13,72.517 h1.27; Top Overlay "GND" at 151.13,69.977 h1.27